# EAGLE board mains_module (EAGLE 6.6.0)

Size 100 x 80 mm. Coordinates in mm from the lower left corner, seen from the top.
Outline: 0,0 100,0 100,80 0,80 0,0
Copper layers (1*16): Top 0.035mm / dielectric 1.5mm / Bottom 0.035mm
Design rules "default": minimum track width 10mil, minimum drill 24mil, track to track 8mil, track to pad 8mil, pad to pad 8mil, via to via 8mil, smd to smd 8mil, copper to edge 40mil, drill to drill 8mil, minimum pad ring 10mil, minimum via ring 8mil, stop-mask expansion 4mil, vias tented up to drill 0mil, thermal gap 10mil

## Footprints (pad centres in the part's own frame; a part is rotated, then mirrored left to right if it is on the bottom)
DO41-10 = drill 1.118: A 5.08,0; C -5.08,0
SIMPLE_HOLE = drill 2.54 pad 3.048: P$1 0,0
SIMPLE_HOLE_SM = drill 1.778 pad 2.286: P$1 0,0
DIL04 = drill 0.813 offset: 1 -1.27,-3.81; 2 1.27,-3.81; 3 1.27,3.81; 4 -1.27,3.81
TO220BV = drill 1.016 long: D 0,-2.54; G -2.54,-2.54; S 2.54,-2.54
0204/5 = drill 0.813 octagon: 1 -2.54,0; 2 2.54,0
22-23-2051 = drill 1 long: 1 -5.08,0; 2 -2.54,0; 3 0,0; 4 2.54,0; 5 5.08,0

## Placement (x,y rotation side)
D1  1N4004  [DO41-10]  -19.05,29.21 0 top  (outside the outline)
D2  1N4004  [DO41-10]  -31.75,29.21 0 top  (outside the outline)
D3  1N4004  [DO41-10]  -19.05,36.83 0 top  (outside the outline)
H1  SEW_HOLE  [SIMPLE_HOLE]  -29.21,35.56 0 top  (outside the outline)
H2  SEW_HOLE  [SIMPLE_HOLE]  -34.29,35.56 0 top  (outside the outline)
H3  SEW_HOLE  [SIMPLE_HOLE]  -39.37,35.56 0 top  (outside the outline)
H4  SEW_HOLE-SMALL  [SIMPLE_HOLE_SM]  -15.24,46.99 0 top  (outside the outline)
H5  SEW_HOLE-SMALL  [SIMPLE_HOLE_SM]  -19.05,46.99 0 top  (outside the outline)
H6  SEW_HOLE-SMALL  [SIMPLE_HOLE_SM]  -22.86,46.99 0 top  (outside the outline)
H7  SEW_HOLE-SMALL  [SIMPLE_HOLE_SM]  -26.67,46.99 0 top  (outside the outline)
H8  SEW_HOLE-SMALL  [SIMPLE_HOLE_SM]  -30.48,46.99 0 top  (outside the outline)
OK1  PC817  [DIL04]  -17.78,7.62 0 top  (outside the outline)
OK2  PC817  [DIL04]  -27.94,7.62 0 top  (outside the outline)
Q1  IRF540  [TO220BV]  -33.02,22.86 0 top  (outside the outline)
R1  [0204/5]  -16.51,41.91 0 top  (outside the outline)
R2  [0204/5]  -24.13,41.91 0 top  (outside the outline)
R3  [0204/5]  -31.75,41.91 0 top  (outside the outline)
R4  [0204/5]  -39.37,41.91 0 top  (outside the outline)
X1  22-23-2051  [22-23-2051]  -20.32,20.32 0 top  (outside the outline)

## Library data of the parts
D1-D3 = diode
H1-H8 = LilyPad-Wearables
OK1 OK2 = optocoupler; MPN: PC817X4J000F; OC_FARNELL: 9707727; OC_NEWARK: 97K7059
Q1 = transistor-power
R1-R4 = resistor
X1 = con-molex; MF: MOLEX; MPN: 22-23-2051; OC_FARNELL: 1462952; OC_NEWARK: 38C9178

## Nets
12V: D1.C OK1.4 X1.3
GND: OK1.2 Q1.S R4.1 X1.5
N$1: OK2.3 X1.1
N$2: OK2.4 X1.2
N$3: H1.P$1 H4.P$1
N$4: OK1.1 R3.1
N$5: D1.A Q1.D
N$6: R3.2 X1.4
N$7: OK1.3 Q1.G R4.2
N$8: H2.P$1 H5.P$1
N$9: H3.P$1 H6.P$1
N$10: D2.A H8.P$1
N$11: D2.C
N$12: D3.C OK2.1 R1.2 R2.1
N$13: D3.A H7.P$1 OK2.2 R1.1

## Tracks (layer width: path | path; a pad name or v marks a point on that pad's centre or on a via)
12V  (2 unrouted)
GND  (3 unrouted)
N$1  (1 unrouted)
N$2  (1 unrouted)
N$3  (1 unrouted)
N$4  (1 unrouted)
N$5  (1 unrouted)
N$6  (1 unrouted)
N$7  (2 unrouted)
N$8  (1 unrouted)
N$9  (1 unrouted)
N$10  (1 unrouted)
N$12  (3 unrouted)
N$13  (3 unrouted)